# Altium PCB Attempt2.PcbDoc
Units mil, origin at the board's own origin, x right, y up, seen from the top; angles counter-clockwise.
Board outline 6000 x 4000 mil, 2 copper layers (Top Layer, Bottom Layer); 35 components, 23 nets, 93 pads, 4 vias.
Unrouted connection lines stored in the file: 5.
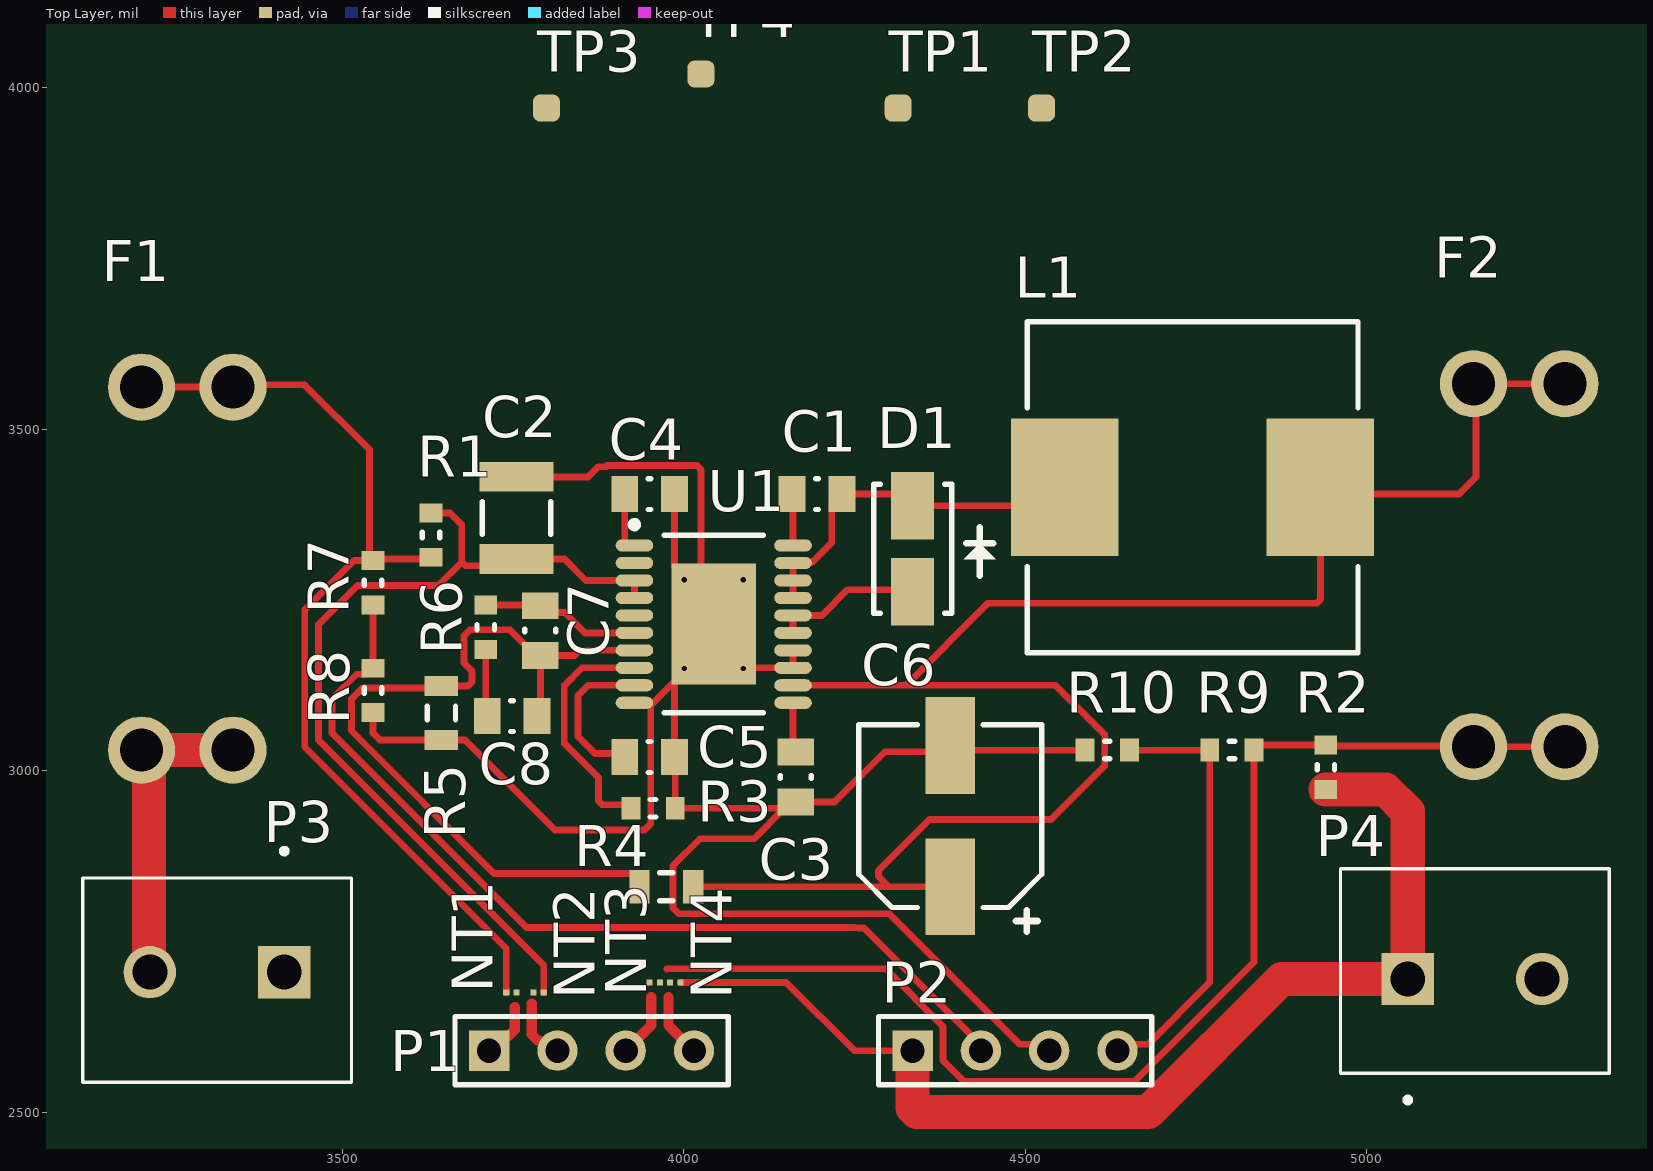
[diagram p0: Top Layer view]
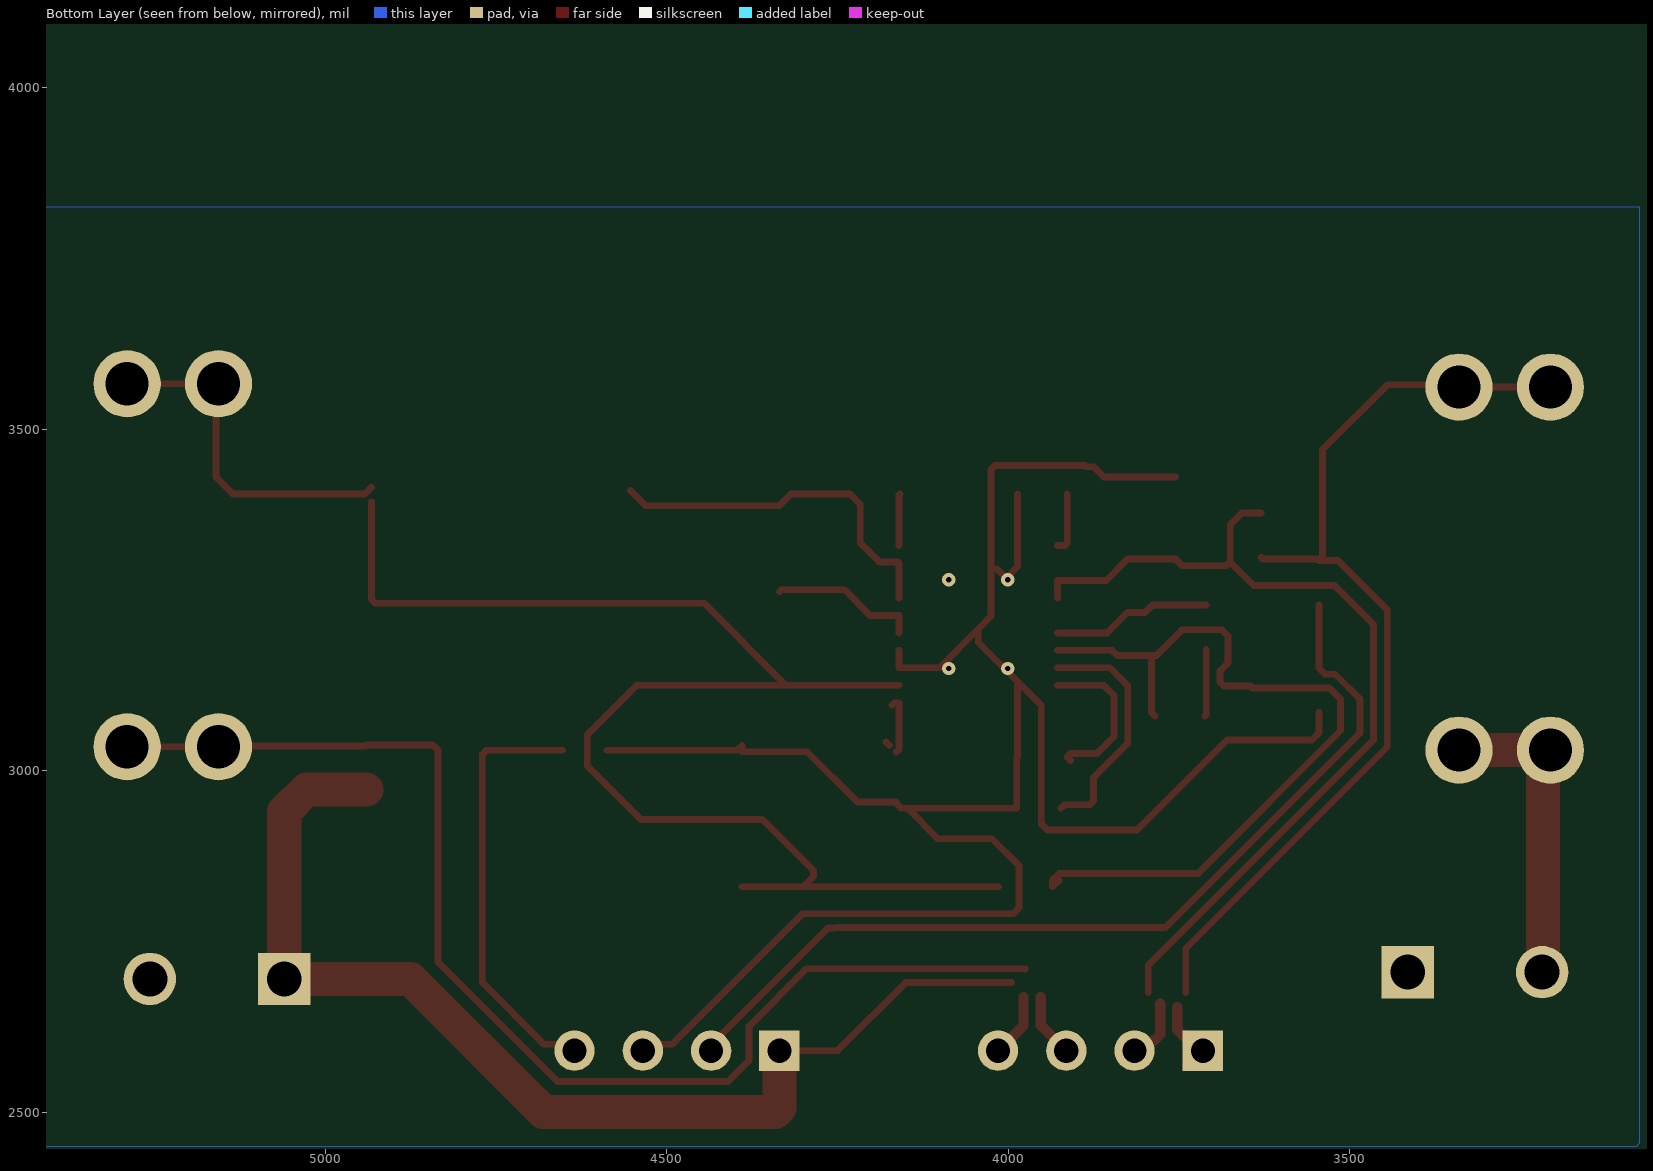
[diagram p1: Bottom Layer view, seen from below]
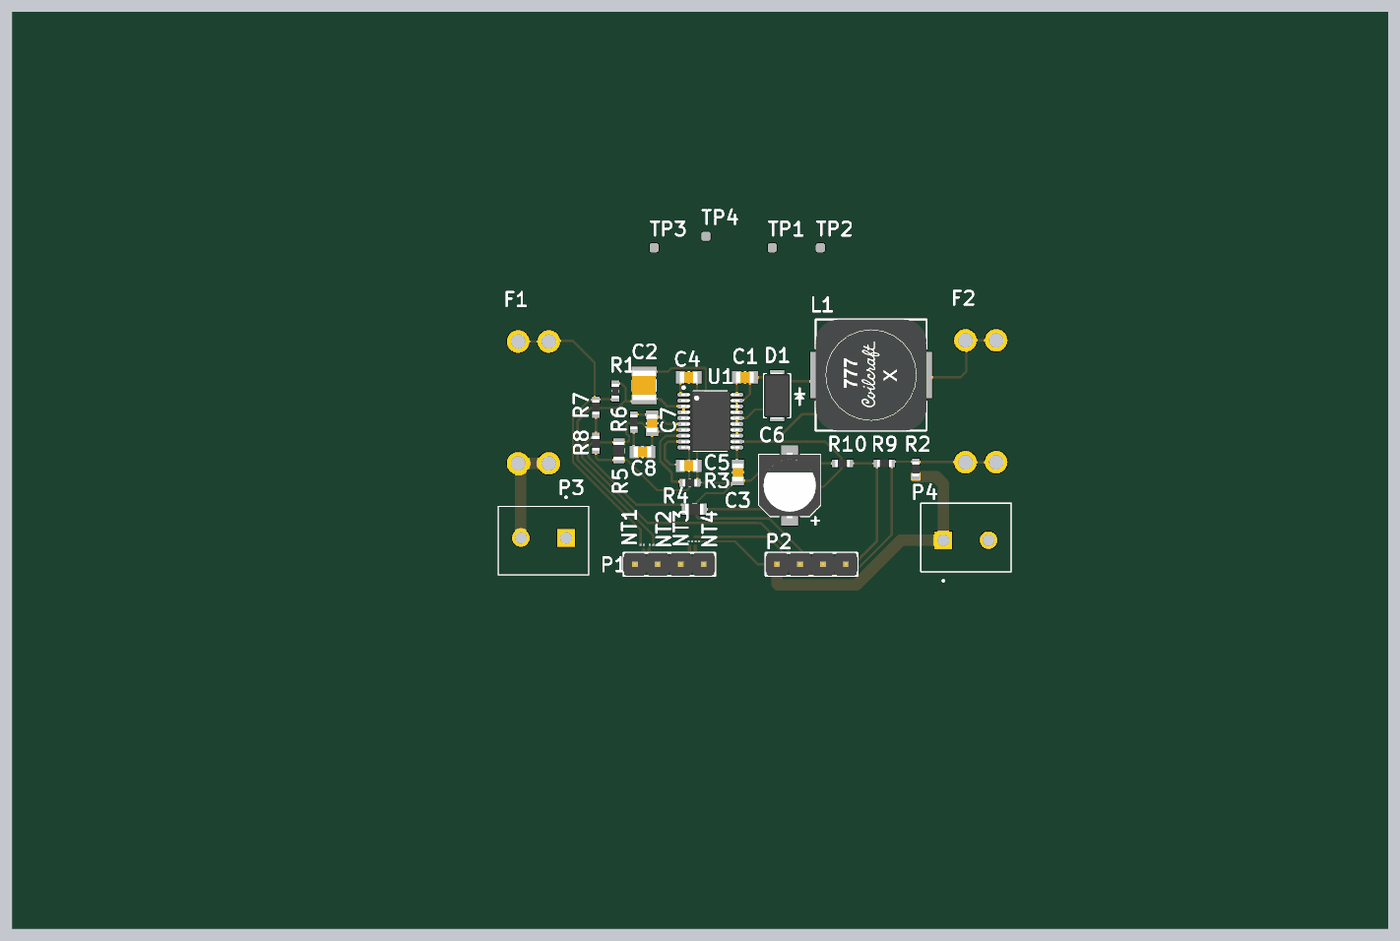
[diagram p2: 3D render of the assembled board from above, using the file's embedded part models]

## Layer stack, top to bottom
Top Solder: solder mask 0.4, Solder Resist, Dk 3.5
Top Layer: signal copper 1.4
Dielectric 1: dielectric 12.6, FR-4, Dk 4.8
Bottom Layer: signal copper 1.4
Bottom Solder: solder mask 0.4, Solder Resist, Dk 3.5

## Board outline
1000,1000 7000,1000 7000,5000 1000,5000

## Design rules (kind name [scope] priority, off if disabled: settings)
Clearance [All] p1: gap=10 ignorepadtopadclearanceinfootprint=FALSE except(0: Arc-Hole Track-Hole SMDPad-Hole THPad-Hole Via-Hole Fill-Hole Poly-Hole Region-Hole Text-Hole)
DiffPairsRouting [All] p1: maxlimit=10 minlimit=10 mostfreqgap=10 toplayer_minwidth=15 toplayer_maxwidth=15 toplayer_prefwidth=15 bottomlayer_minwidth=15 bottomlayer_maxwidth=15 bottomlayer_prefwidth=15 maxuncoupledlength=500
PolygonConnect PolygonConnect_2 [All vs IsNamedPolygon('GND_L02_P000')] p1: thpad.connectstyle=Relief thpad.reliefconductorwidth=10 thpad.reliefentries=4 thpad.polygonreliefangle="90 Angle" thpad.airgapwidth=10 smdpad.connectstyle=Direct smdpad.reliefconductorwidth=10 smdpad.reliefentries=4 smdpad.polygonreliefangle="90 Angle" smdpad.airgapwidth=10 via.connectstyle=Relief via.reliefconductorwidth=10 via.reliefentries=4 via.polygonreliefangle="90 Angle" via.airgapwidth=10
PolygonConnect PolygonConnect_1 [All vs IsNamedPolygon('GND_L02_P000')] p2: thpad.connectstyle=Relief thpad.reliefconductorwidth=10 thpad.reliefentries=4 thpad.polygonreliefangle="90 Angle" thpad.airgapwidth=10 smdpad.connectstyle=Direct smdpad.reliefconductorwidth=10 smdpad.reliefentries=4 smdpad.polygonreliefangle="90 Angle" smdpad.airgapwidth=10 via.connectstyle=Relief via.reliefconductorwidth=10 via.reliefentries=4 via.polygonreliefangle="90 Angle" via.airgapwidth=10
PolygonConnect [All] p3: connectstyle=Relief reliefconductorwidth=10 reliefentries=4 polygonreliefangle="90 Angle" airgapwidth=10
RoutingVias [All] p1: holewidth=28 width=50 viastyle="Through Hole" minholewidth=28 minwidth=50 maxholewidth=28 maxwidth=50
SolderMaskExpansion [All] p1: expansion=4 istentingtop=FALSE
Width [All] p1: maxlimit=10 minlimit=10 preferedwidth=10
29 further rules are at their usual default settings.

## Classes and differential pairs
differential pair 24V: +24V_P -24V_N
differential pair 5V: +5V_P -5V_N

## Components (designator, comment, footprint, x,y, rotation, side; value= is the part's Value field where it differs from the comment)
C1 "" "0805 - Capacitor" 4195,3405 r180 top value=22nF
C2 "" "1210 - Capacitor" 3755,3370 r270 top value=2.2uF
C3 "" "0805 - Capacitor" 4163.99,2990.73 r90 top value=10nF
C4 "" "0805 - Capacitor" 3950,3405 r180 top value=100nF
C5 "" "0805 - Capacitor" 3950,3020 r180 top value=270pF
C6 "" "OCVZ0606 - CAPACITOR" 4390,2933.44 r90 top value=100uF
C7 "" "0805 - Capacitor" 3790,3205 r90 top value=120pF
C8 "" "0805 - Capacitor" 3748.58,3080 r180 top value=2.7nF
D1 "Diode - Schottky" "SMA - DIODE" 4335,3325 r90 top
F1 "Fuse" 3557-2 3206.14,3561.5 r270 top
F2 "Fuse" 3557-2 5290,3035 r90 top
L1 "Inductor" "MSS1210 - INDUCTOR" 4745,3415 r0 top value=27uH
NT1 "NetTie" "Net Tie" 3740,2675 r90 top net-tie
NT2 "NetTie" "Net Tie" 3795,2675 r270 top net-tie
NT3 "NetTie" "Net Tie" 3965,2690 r270 top net-tie
NT4 "NetTie" "Net Tie" 3995,2690 r270 top net-tie
P1 "1x4 Header" HDR1X4 3715,2590 r0 top
P2 "1x4 Header" HDR1X4 4335,2590 r0 top
P3 "CUI_TB002-500-02" CUI_TB002-500-02 3415,2705 r180 top
P4 "CUI_TB002-500-02" CUI_TB002-500-02 5060,2695 r0 top
R1 "Resistor" "0603 - Resistor" 3630,3345 r270 top
R2 "Resistor" "0603 - Resistor" 4940,3005 r270 top
R3 "" "0603 - Resistor" 3955,2945 r180 top value=20.5k
R4 "" "0805 - Resistor" 3974.37,2830 r0 top value=3.09k
R5 "" "0805 - Resistor" 3645,3084.37 r90 top value=1k
R6 "" "0603 - Resistor" 3710,3210 r90 top value=19.1k
R7 "Resistor" "0603 - Resistor" 3545,3275 r90 top value=75k
R8 "Resistor" "0603 - Resistor" 3545,3117.48 r270 top value=10k
R9 "Resistor" "0603 - Resistor" 4802.52,3030 r0 top value=10k
R10 "Resistor" "0603 - Resistor" 4620,3030 r0 top value=10k
TP1 "Test Point" "Test Point" 4313.86,3970.16 r90 top
TP2 "Test Point" "Test Point" 4523.86,3970.16 r90 top
TP3 "Test Point" "Test Point" 3798.86,3970.16 r90 top
TP4 "Test Point" "Test Point" 4025,4020 r90 top
U1 "LM5005" LM5005 4043.86,3214.57 r0 top

## Footprints (in the part's own frame and the unit in brackets; to place one, negate y for a bottom-side part, rotate by r counter-clockwise, add the part's x,y. Pads: shape width x height; smd on the part's side, far side on the other; paste and mask are expansions set on the pad)
"0603 - Resistor" [mm] "0603 Chip Resistor - IPC Medium Density"
  rect 0.7x0.85 smd: 1(-0.825,0) 2(0.825,0)
  silkscreen extent -0.1,-0.33 0.1,0.33, body extent -0.8,-0.4 0.8,0.4, height 0.45
"0805 - Capacitor" [mm] "0805 Chip Capacitor - IPC Medium Density"
  rect 1x1.35 smd: 1(-0.925,0) 2(0.925,0)
  silkscreen extent -0.05,-0.58 0.05,0.58, body extent -1,-0.6 1,0.6, height 1.2
"0805 - Resistor" [mm] "0805 Chip Resistor - IPC Medium Density"
  rect 0.75x1.25 smd: 1(-1,0) 2(1,0)
  silkscreen extent -0.25,-0.53 0.25,0.53, body extent -1,-0.6 1,0.6, height 0.5
"1210 - Capacitor" [mm] "1210 Chip Capacitor - IPC Medium Density"
  rect 1.1x2.75 smd: 1(-1.525,0) 2(1.525,0)
  silkscreen extent -0.6,-1.27 0.6,1.27, body extent -1.65,-1.3 1.65,1.3, height 1.6
3557-2 [mm] "Fuse Holder"
  round 2.5 hole 1.6: 1(0,3.4) 1(0,0) 2(13.5,0) 2(13.5,3.4)
CUI_TB002-500-02 [mm] "1x2 Screw Terminal Block"
  rect 1.95x1.95 hole 1.3: 1(0,0)
  round 1.95 hole 1.3: 2(5,0)
  silkscreen extent -2.5,-4.6 7.5,4.1, body extent -2.5,-3.95 8,3.65, height 10
HDR1X4 [mm] "Connector; Header; 4 Position"
  rect 1.5x1.5 hole 0.9: 1(0,0)
  round 1.5 hole 0.9: 2(2.54,0) 3(5.08,0) 4(7.62,0)
  silkscreen extent -1.27,-1.27 8.89,1.27, body extent -1.27,-1.27 8.89,1.27, height 8.54
LM5005 [mm] "20-PowerTSSOP (0.173\"\", 4.40mm Width)"
  oval 1.4x0.45 smd: 1(-2.95,2.925) 2(-2.95,2.275) 3(-2.95,1.625) 4(-2.95,0.975) 5(-2.95,0.325) 6(-2.95,-0.325) 7(-2.95,-0.975) 8(-2.95,-1.625) 9(-2.95,-2.275) 10(-2.95,-2.925) 11(2.95,-2.925) 12(2.95,-2.275) 13(2.95,-1.625) 14(2.95,-0.975) 15(2.95,-0.325) 16(2.95,0.325) 17(2.95,0.975) 18(2.95,1.625) 19(2.95,2.275) 20(2.95,2.925)
  rect 3.15x4.5 smd: 21(0,0)
  silkscreen extent -3.07,-3.3 1.85,3.82, body extent -3.2,-3.3 3.2,3.3, height 1.1
"MSS1210 - INDUCTOR" [mm] "Precision Wire Wound Inductor, 2-Leads, Body 12.00x12.00mm, IPC Medium Density"
  rect 4x5.1 smd: 1(-4.75,0) 2(4.75,0)
  silkscreen extent -6.15,-6.15 6.15,6.15, body extent -6.15,-6.15 6.15,6.15, height 10.16
"Net Tie" [mil] "General Net TIe"
  rect 9x9 smd mask+0: 1(0,0) 2(0,-15)
"OCVZ0606 - CAPACITOR" [mm] "Aluminum Electrolytic Capacitor, Body 6.60x6.60x6.00mm, IPC Low Density"
  rect 3.6x1.85 smd: 1(-2.625,0) 2(2.625,0)
  silkscreen extent -4.3,-3.4 3.4,3.4, body extent -3.6,-3.4 3.6,3.4, height 6
"SMA - DIODE" [mm] "Molded Diode, 2-Leads, Body 4.38x2.63mm, IPC Medium Density"
  rect 2.5x1.6 smd: 1(-1.6,0) 2(1.6,0)
  silkscreen extent -2.4,-3.1 2.4,1.45, body extent -2.6,-1.43 2.6,1.43, height 2.95
"Test Point" [mm] "Test Point"
  rrect50% 1x1 smd: 0(0,0)

## Part data
C1 C2 C3 C4 C5 C7 C8: library part "Capacitor - Nonpolarized", "Nonpolarized Capacitor", Supplier 1=Digi-Key
C6: library part "Capacitor - Polarized", "Polarized Capacitor", Supplier 1=Digi-Key
D1: "Schottky Rectifier", ComponentLink1Description="Manufacturer Link", ComponentLink1URL=http://www.irf.com/, ComponentLink2Description=Datasheet, ComponentLink2URL=http://www.irf.com/product-info/datasheets/data/10tq.pdf, Supplier 1=Digi-Key
NT1 NT2 NT3 NT4: library part "Net Tie"
P1 P2: "1x4 Pin Header"
P3 P4: "1x2 Screw Terminal Block", Manufacturer="CUI Devices", Manufacturer Part Number=TB002-500-02BE, Supplier Part Number=102-6145-ND, Supplier=Digikey
R3 R4 R5 R6: library part Resistor, "Resistor", Supplier 1=Digi-Key
R7: Supplier Part Number 1=P75KBYCT-ND, Supplier 1=Digi-Key
U1: "7V to 75V 2.5A, Buck Converter", Manufacturer="Texas Instruments", Manufacturer Part Number=LM5005MHX/NOPB, Supplier Part Number=926-LM5005MHX/NOPB, Datasheet=https://www.ti.com/lit/ds/symlink/lm5005.pdf?HQS=TI-null-null-digikeymode-df-pf-null-wwe&ts=1606456124909, Supplier=Mouser, Supplier 1=Digi-Key
L1: Supplier 1=Mouser

## Via types
v1: diameter 19.68, hole 7.87, Top Layer to Bottom Layer, 4 vias

## Nets (pads, with @x,y where several pads share a name; then routed paths per layer and width w, separated by ;. In a path a pad name is that pad's centre, name@x,y a point inside that pad or via, vN(x,y) a via of type N, cw(c..) or ccw(c..) an arc to the next point about the centre after c; other vN are vias at no path point)
"5V VSENSE": P2.4 R9.1 R10.2 | length 635.4
  Top Layer w10: P2.4@4630,2600 4635,2595 4639.39,2599.39 4679.39,2599.39 4770.04,2690.04 4770.04,3023.78 4763.82,3030 R10.2
5V_N: NT4.2 P1.4 | length 102.9
  Top Layer w15: 3977.5,2668.75 3977.5,2627.5 P1.4 P1.4@4008.93,2583.93
5V_P: NT3.2 P1.3 | length 99.3
  Top Layer w15: P1.3@3920,2590 P1.3 3952.5,2627.5 3952.5,2668.75
"24V VSENSE": P2.2 R7.1 R8.1 | length 1362.9
  Top Layer w10: R7.1 R8.1 3536.22,3141.18 3521.17,3141.18 3485,3105.01 3485,3055 3769.61,2770.39 4250,2770.39 ; 4255.54,2769.46 4264.09,2769.46 4435,2598.55 P2.2
24V_N: NT2.2 P1.2 | length 92.4
  Top Layer w15: 3777.5,2658.75 3777.5,2613.65 3786.29,2604.86 3788.21,2604.86 3803.08,2590 P1.2
24V_P: NT1.2 P1.1 | length 114.4
  Top Layer w15: P1.1@3737.03,2567.97 P1.1 3737.03,2612.03 3743.71,2612.03 3752.5,2620.81 3752.5,2653.75
+5V: NT4.1 P2.1 P4.1 R2.2 | length 1652.2
  Top Layer w10: NT4.1 4150,2690 4250,2590 P2.1 ; 4335,2505.86 4340.86,2500
  Top Layer w50: 4335,2505.86 P2.1 ; 4340.86,2500 4680,2500 4875,2695 P4.1 5060,2940 5027.48,2972.52 R2.2
+24V: F1.2 P3.2 | length 474.2
  Top Layer w10: F1.2@3206.14,3030 F1.2@3217.15,3019 ; P3.2@3207.15,2731 P3.2@3233.15,2705
  Top Layer w50: F1.2@3206.14,3030 F1.2@3340,3030 ; P3.2@3217.15,2731 F1.2@3217.15,3019
GND: C2.1 C3.1 C4.1 C5.1 C6.2 P2.3 R3.1 R5.1 R8.2 R10.1 U1.10 U1.13 U1.14 U1.21 | length 3391.9
  Top Layer w10: R8.2 3545,3055 3555,3045 R5.1 3679.69,3045 3811.42,2913.27 3942.51,2913.27 3951.73,2922.49 3951.73,3095.87 U1.21@3986.42,3130.55 ; C2.1 3860.04,3430.04 3875,3445 3886.11,3445 3887.68,3446.57 4019.14,3446.57 4025,3440.72 4025,3226.46 U1.21@4043.86,3207.6 ; C4.1 3986.42,3298.58 4000.55,3284.45 v1(4000.55,3279.53) U1.21@4016.42,3295.39 ; U1.14 U1.13 4100.87,3150.59 U1.21@4043.86,3207.6 ; C3.1 4220.69,2954.31 4220.86,2954.14 4294.4,3027.68 4390,3027.68 C6.2 4396.79,3030 R10.1 ; C3.1@4164.54,2952.45 4157.08,2945 C3.1@4147.79,2945 ; P2.3 4525.61,2599.39 4492.21,2599.39 4301.2,2790.39 3992.76,2790.39 3983.98,2799.18 3983.98,2860.82 4023.38,2900.22 4103.01,2900.22 C3.1@4147.79,2945 ; U1.21@3986.42,3130.55 4043.86,3187.99 U1.21@4043.86,3207.6 ; U1.21@3986.42,3130.55 C5.1 3987.48,3018.94 R3.1 C3.1@4147.79,2945
  other v1: 4000.55,3149.61 4087.17,3149.61 4087.17,3279.53
NetC1_1: C1.1 D1.2 L1.1 U1.17 U1.18 U1.19 | length 535.1
  Top Layer w10: U1.17 U1.18 U1.19 4161.48,3305.61 4188.33,3305.61 4216.73,3334.01 4216.73,3390.32 C1.1 4317.99,3405 D1.2 4530.98,3387.99 L1.1@4552.99,3410
NetC1_2: C1.2 U1.20 | length 75.9
  Top Layer w10: C1.2 4160,3403.58 U1.20
NetC2_2: C2.2 NT2.1 R1.1 U1.3 U1.4 | length 1328.2
  Top Layer w10: R1.1 3657.52,3377.48 3675,3360 3675,3305.86 ; NT2.1 3795,2715 3465,3045 3465,3214.25 3522.05,3271.3 3640.5,3271.3 3675,3305.79 3675,3305.86 ; U1.4 U1.3 3856.46,3278.54 3825.04,3309.96 C2.2 3745.04,3300 3680.86,3300 3675,3305.86
NetC3_2: C3.2 U1.11 | length 92.5
  Top Layer w10: C3.2 4160,3031.14 U1.11 4166.44,3099.41 U1.11@4170,3095.85 ; C3.2@4173.99,3037.14 C3.2@4178.99,3042.14
NetC4_2: C4.2 U1.1 | length 87.3
  Top Layer w10: C4.2 3913.58,3333.29 3917.15,3329.72 U1.1
NetC5_2: C5.2 U1.9 | length 237
  Top Layer w10: C5.2@3908.58,3015 C5.2 3908.58,3025 3870,3025 3845,3050 3845,3110 3860,3125 U1.9
NetC6_1: C6.1 F2.2 L1.2 R4.2 U1.12 | length 2649.2
  Top Layer w10: R4.2 4300.37,2830 ; U1.12 4325,3125 ; C6.1 4389.91,2830 4300.37,2830 ; L1.2@4932.01,3393.35 4932.01,3250.86 4926.15,3245 4445,3245 4325,3125 ; L1.2 4942.01,3405 5135,3405 5160,3430 5160,3562.64 5156.14,3566.5 F2.2@5290,3566.5 ; 4300.37,2830 4285.03,2845.34 4285.03,2853.62 4359.74,2928.33 4537.58,2928.33 4616.3,3007.05 4616.3,3052.95 4544.25,3125 4325,3125
NetC7_1: C7.1 C8.1 R4.1 R5.2 U1.7 | length 1204.7
  Top Layer w10: C8.1 3790,3085 C7.1 ; R4.1@3925.24,2840 R4.1@3935,2830.24 ; U1.7 3847.9,3176.18 3840.3,3168.58 C7.1 ; R4.1 R4.1@3935,2830.24 ; C7.1 3783.11,3168.58 3745.39,3206.3 3687.05,3206.3 3678.27,3197.51 3678.27,3157.53 3690,3145.79 3690,3129.6 3684.14,3123.74 R5.2 3642.44,3121.18 3529.46,3121.18 3513.27,3104.99 3513.27,3058.45 3722.11,2849.61 3925.24,2849.61 3935,2839.84 R4.1@3935,2830.24
NetC7_2: C7.2 R6.2 U1.6 | length 234.6
  Top Layer w10: R6.2 3788.94,3242.48 C7.2 3799.84,3231.58 3825.72,3231.58 3855.52,3201.77 U1.6
NetC8_2: C8.2 R6.1 | length 98.4
  Top Layer w10: R6.1 3710,3082.16 C8.2
NetD1_1: D1.1 U1.15 U1.16 | length 217.4
  Top Layer w10: U1.15 U1.16 4202.36,3227.36 4240,3265 4332.01,3265 D1.1
NetF1_1: F1.1 NT1.1 R1.2 R7.2 | length 1438.6
  Top Layer w10: F1.1@3206.14,3561.5 3340,3561.5 3343.5,3565 3445,3565 3540,3470 3540,3312.48 R7.2 ; R1.2 3627.48,3310 3547.52,3310 R7.2 ; NT1.1 3740,2740 3445,3035 3445,3235 3517.48,3307.48 R7.2
NetF2_1: F2.1 NT3.1 R2.1 R9.2 | length 1799.6
  Top Layer w10: 3975,2709.5 3975.5,2710 4295.27,2710 4379.53,2625.74 4379.53,2575.47 4410,2545 4660,2545 4835,2720 R9.2 4842.48,3037.48 R2.1 4941.24,3036.24 5154.9,3036.24 5156.14,3035 F2.1@5290,3035
NetR3_2: R3.2 U1.8 | length 355.2
  Top Layer w10: R3.2 3917.52,2950 3880.86,2950 3875,2955.86 3875,2990 3825,3040 3825,3125 3850.59,3150.59 U1.8
pads on no net: P3.1 P4.2 TP1.0 TP2.0 TP3.0 TP4.0 U1.2 U1.5

## Polygon pours and split planes (outlines as drawn)
GND on Bottom Layer "GND_L02_P000" (solid, pour order 0): 3075,3825 5450,3825 5450,2450 3080,2450 3075,2455

## Silkscreen, mask and mechanical layers (free items; w line width, h text height)
Board Outline:
  lines w50: 3050,2445 3050,3840 5470,3840 5470,2425 3070,2425 3050,2445